# EAGLE board v6_06-19-2018_bluetooth-20x20_bac_panelized (EAGLE 9.0.0), part 1 of 4
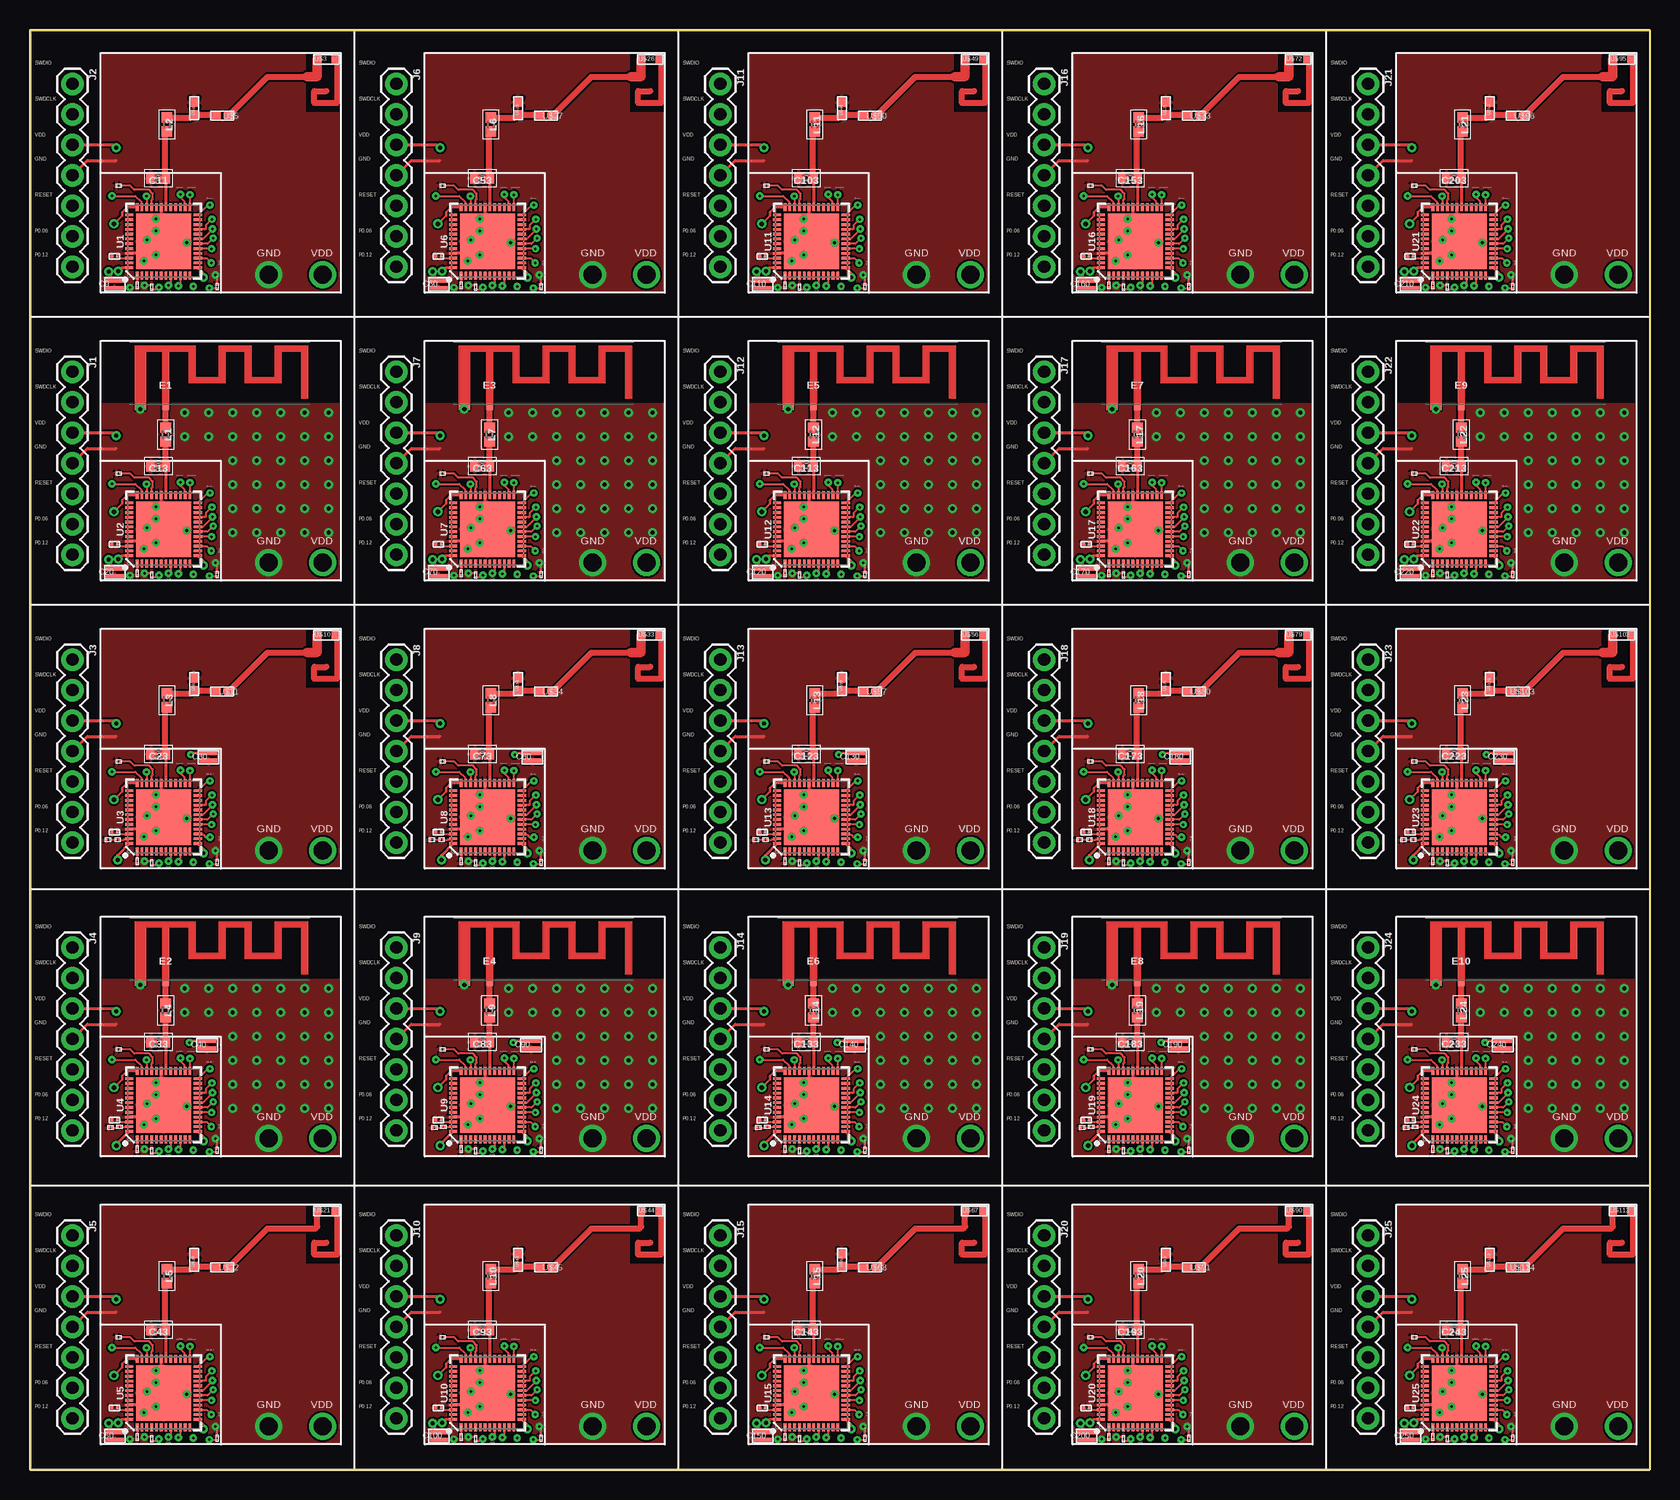
[diagram p0: board, top side]
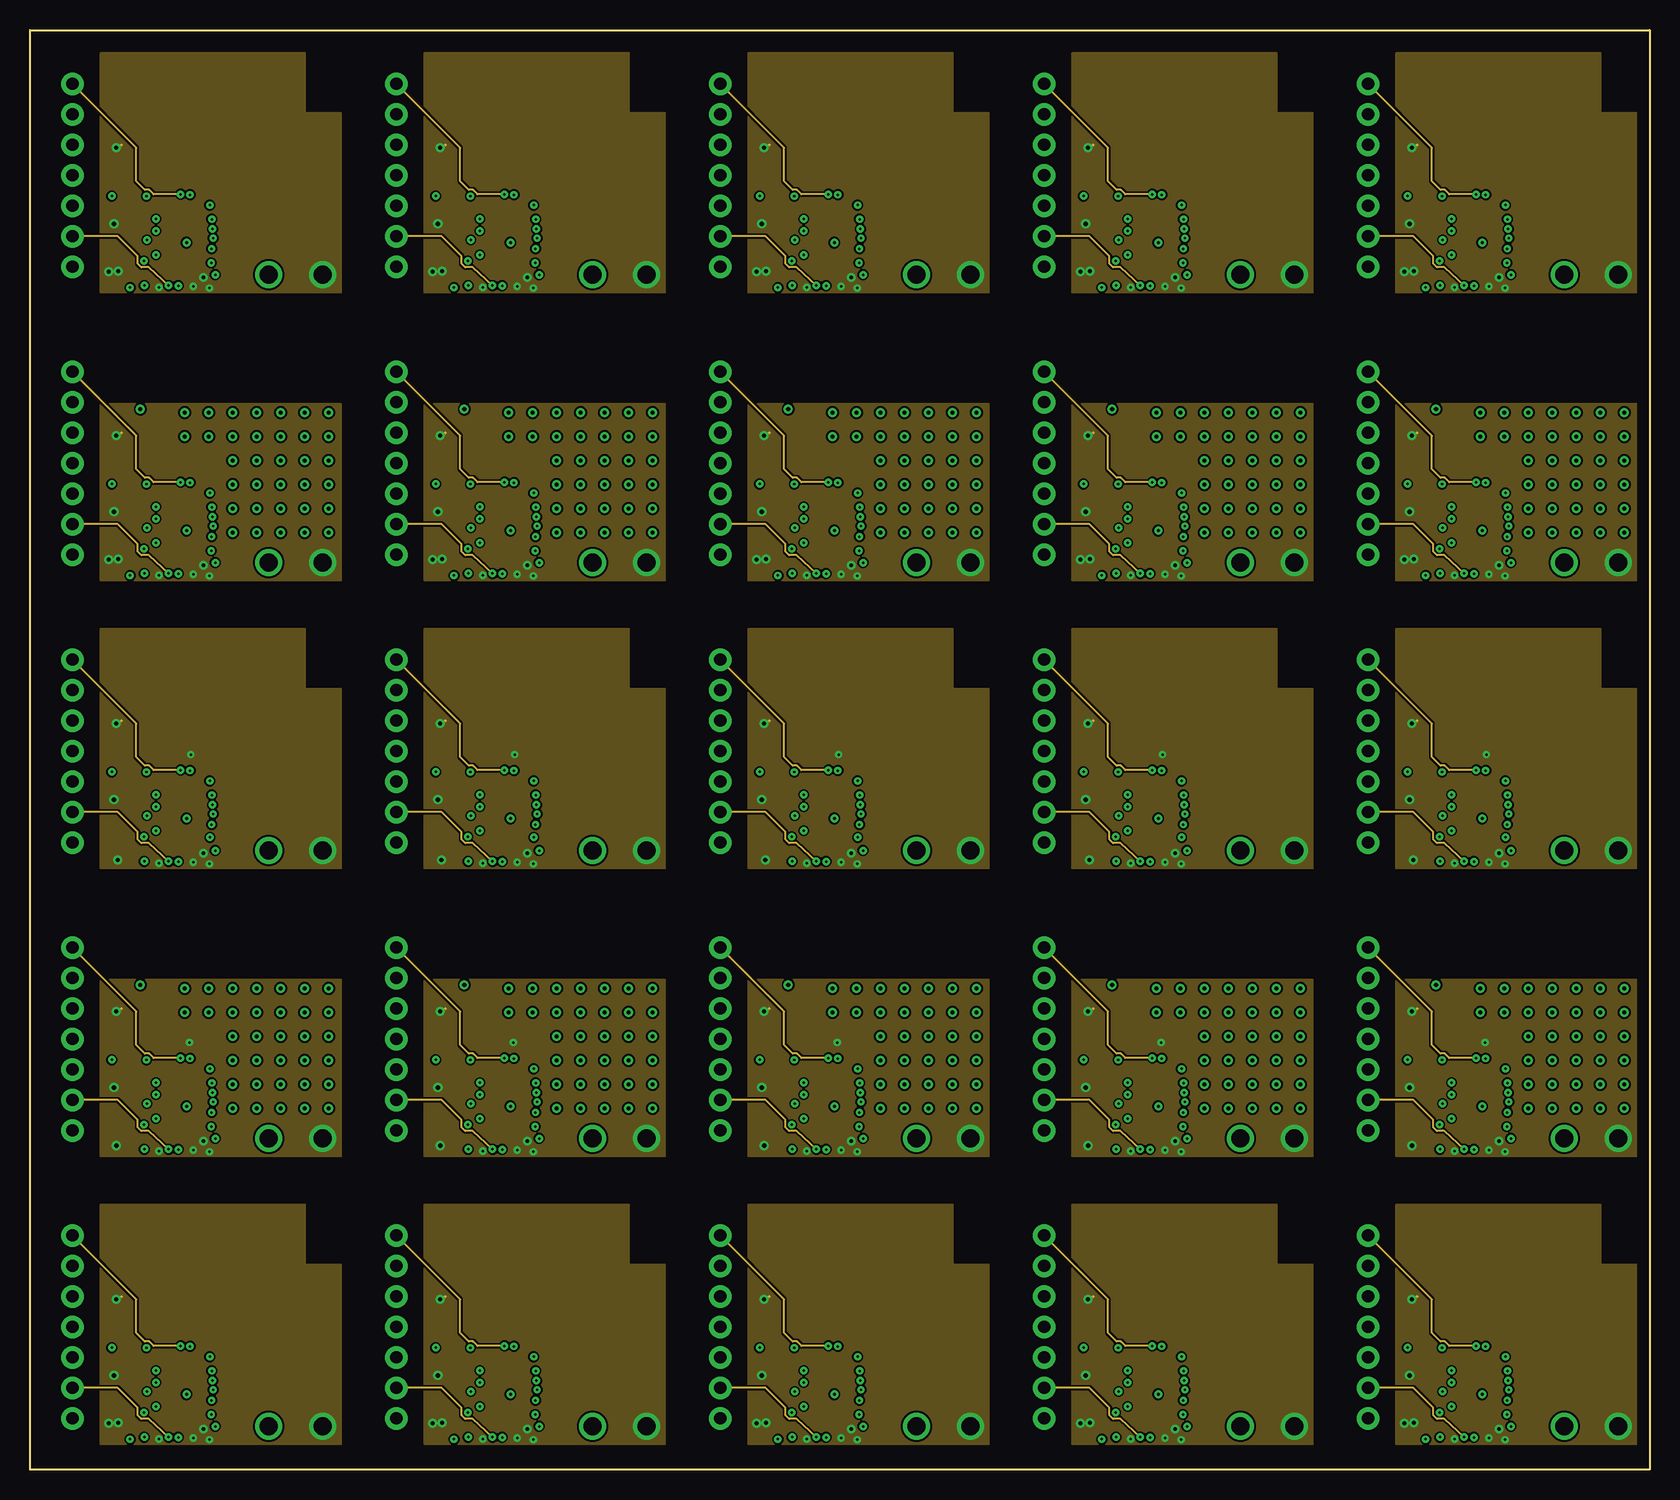
[diagram p1: board, inner layer Route8]
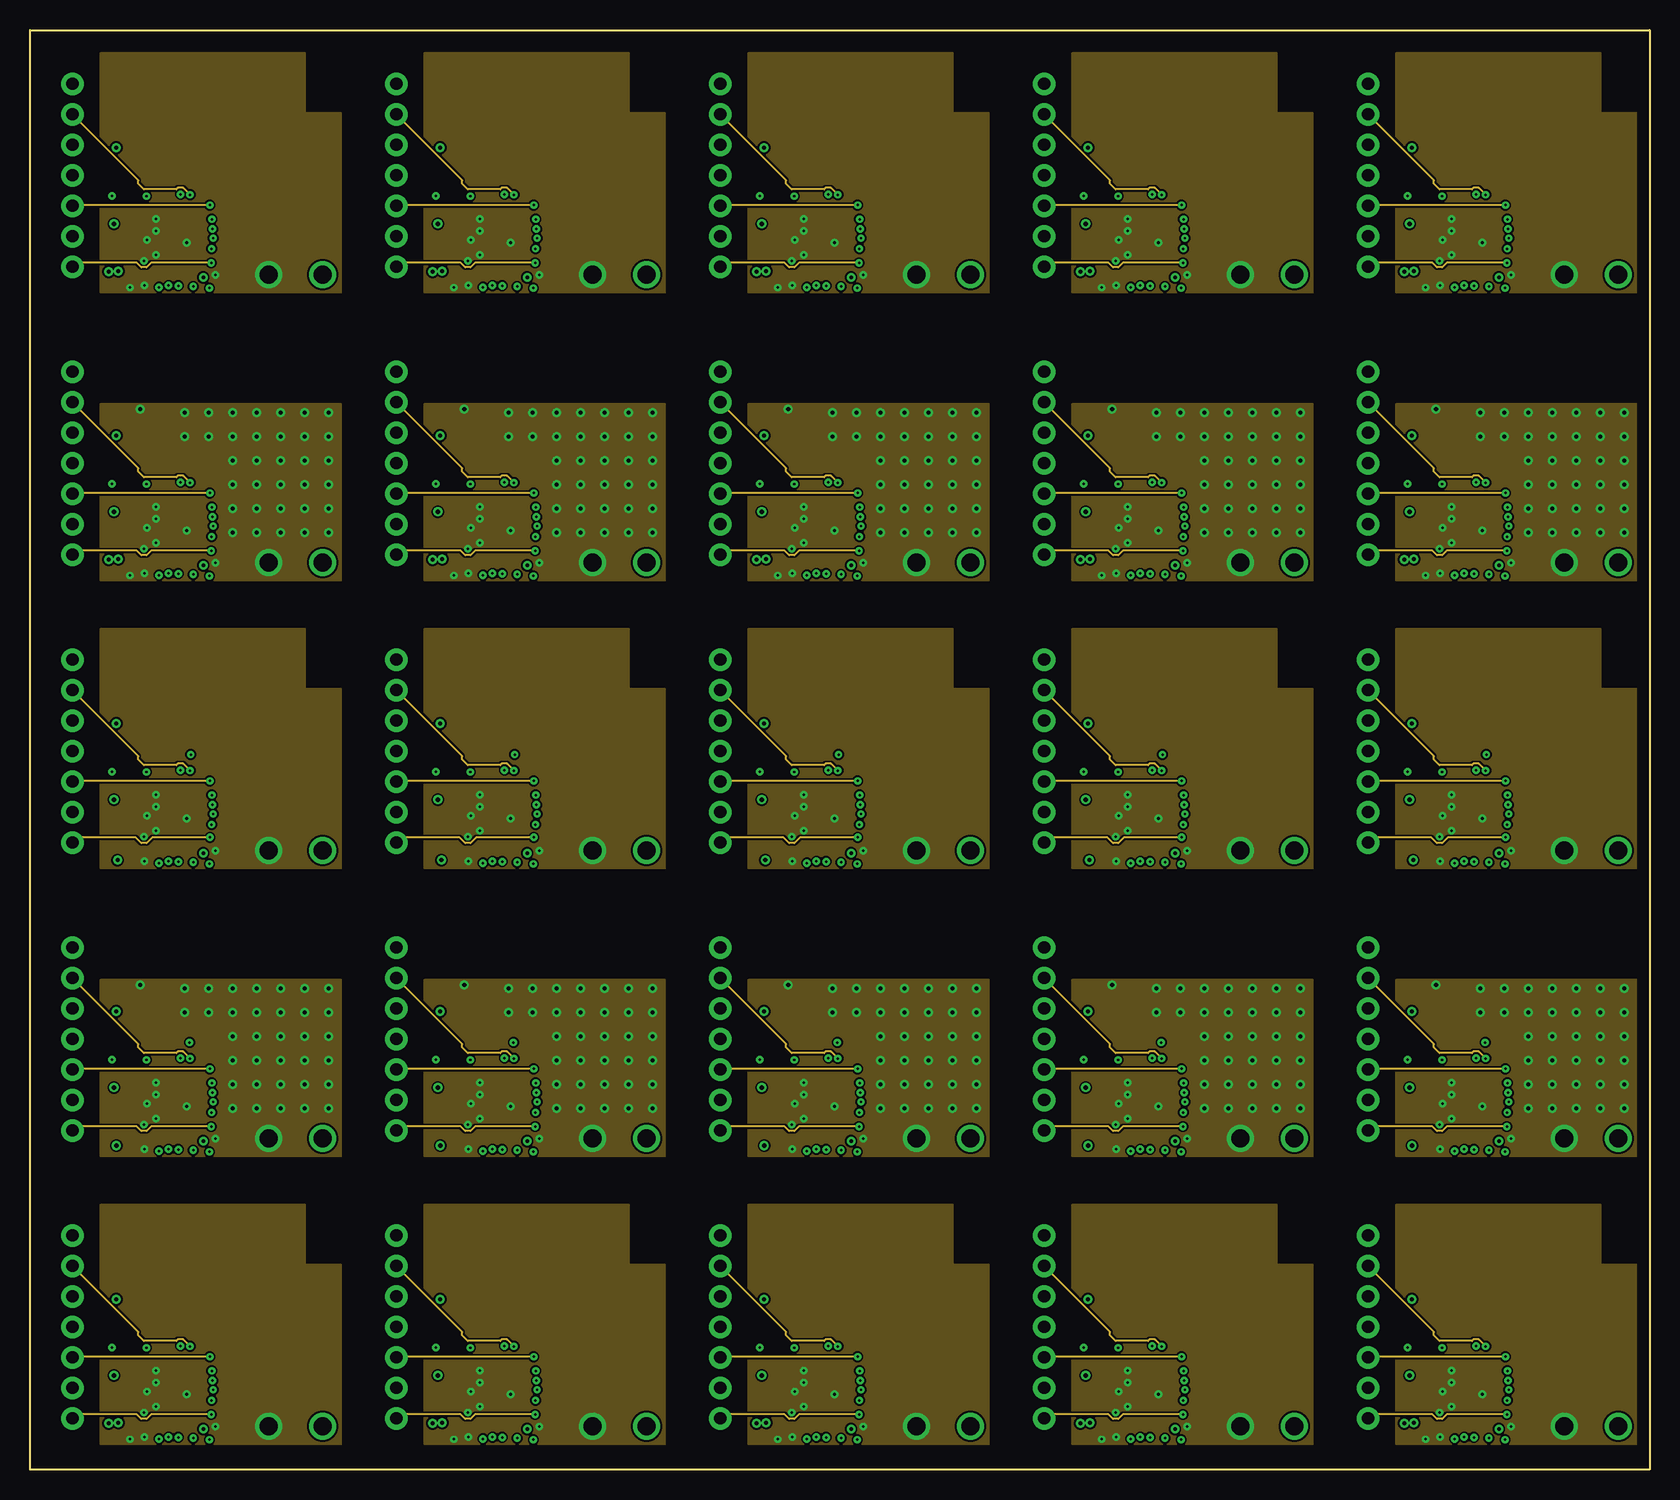
[diagram p2: board, inner layer Route10]
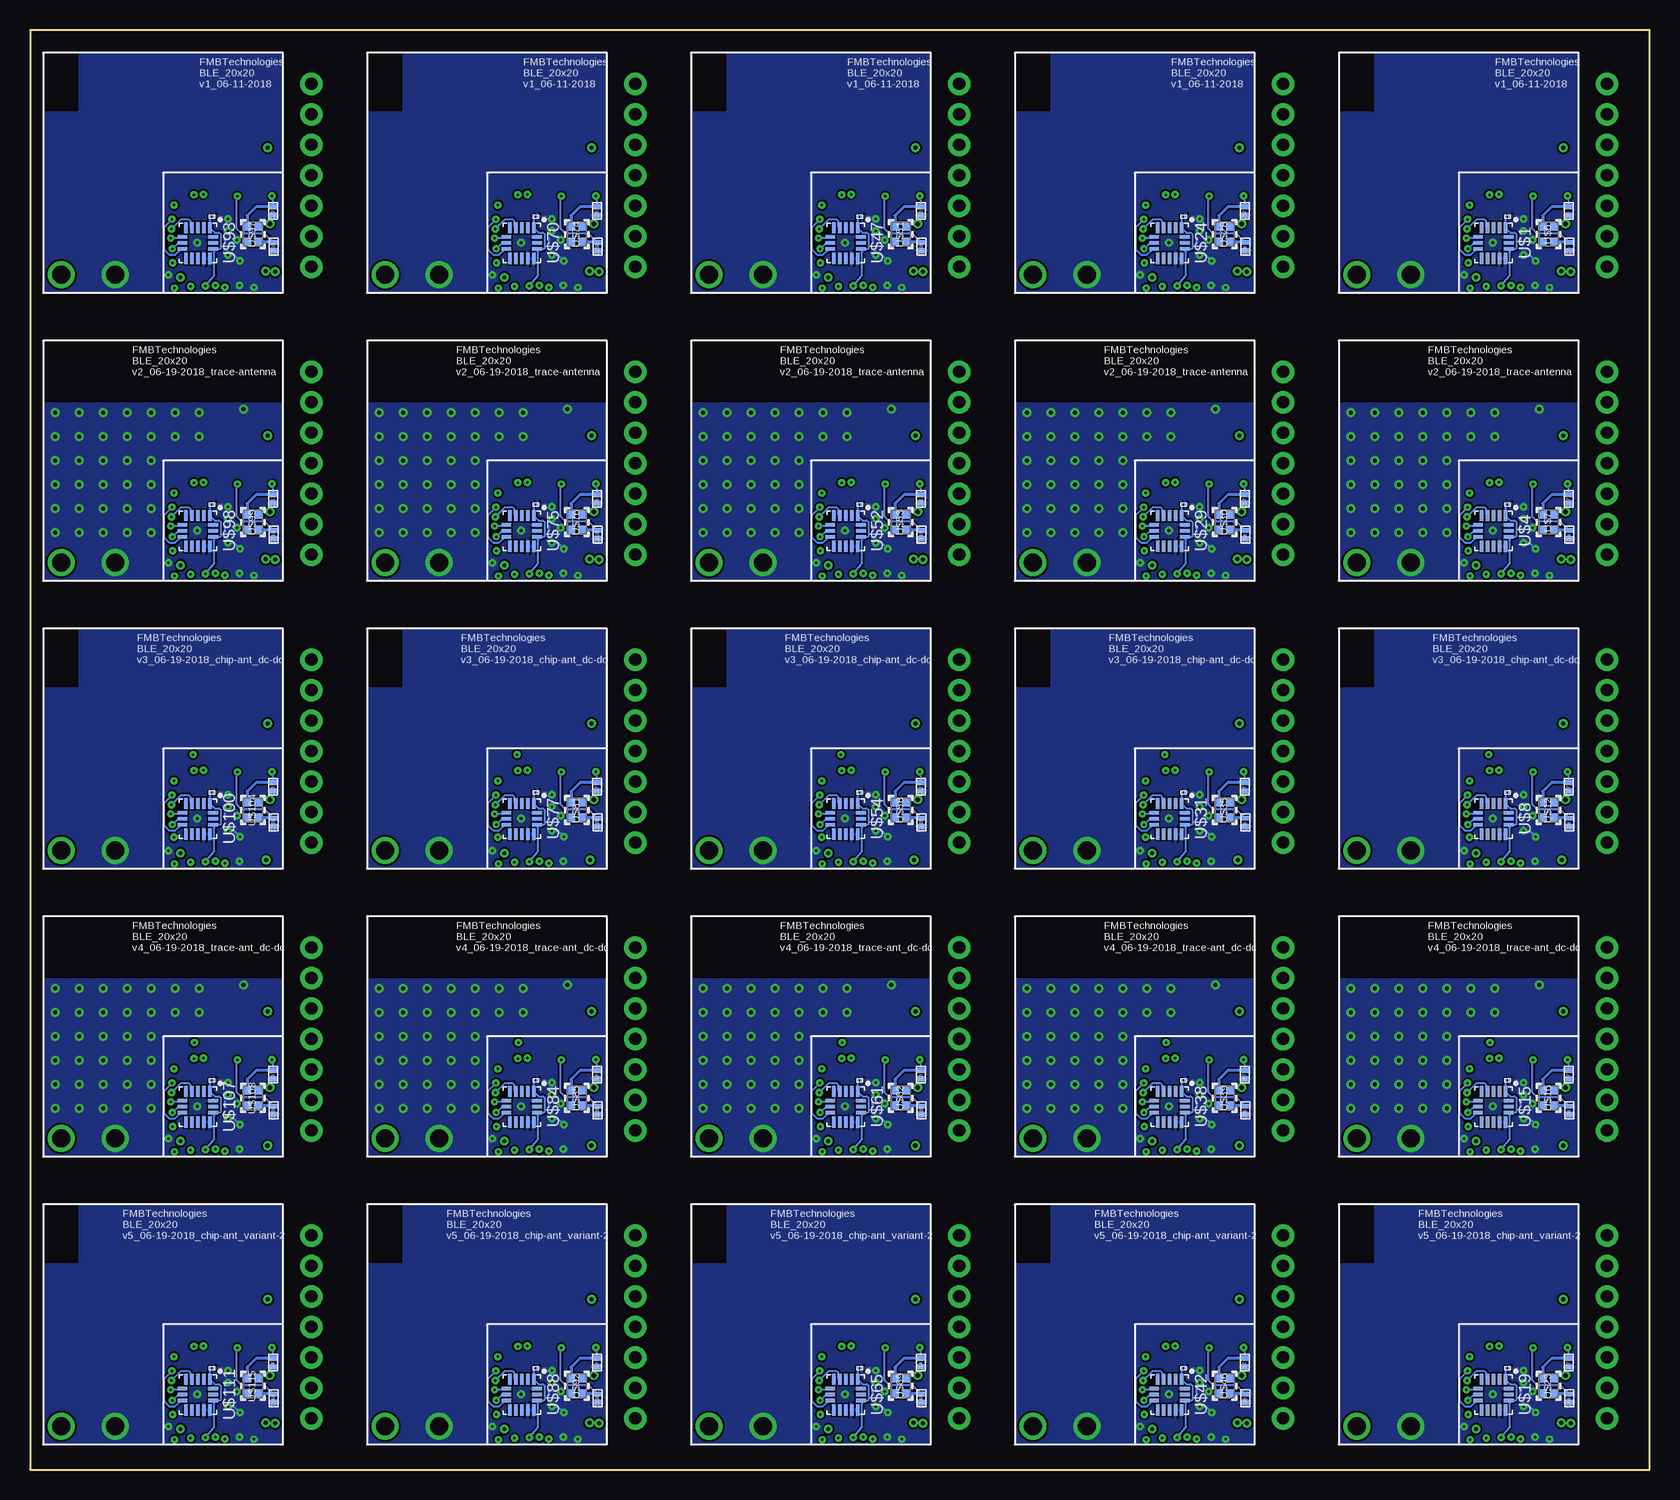
[diagram p3: board, bottom side, seen from below]

Size 135 x 120 mm. Coordinates in mm from the lower left corner, seen from the top.
Outline: 0,0 0,120 135,120 135,0 0,0
Copper layers (1*8*10*16): Top 0.035mm / dielectric 0.175mm / Route8 0.017mm / dielectric 0.145mm / Route10 0.017mm / dielectric 0.175mm / Bottom 0.035mm
Design rules "default *": minimum track width 6mil, minimum drill 8mil, track to track 6mil, track to pad 6mil, pad to pad 6mil, via to via 6mil, smd to smd 6mil, copper to edge 40mil, drill to drill 6mil, minimum pad ring 10mil, minimum via ring 8mil, stop-mask expansion 4mil, vias tented up to drill 0mil, thermal gap 10mil

## Footprints (pad centres in the part's own frame; a part is rotated, then mirrored left to right if it is on the bottom)
CAP_0402-L = smd 0.178 x 0.254: 1 -0.152,0; 2 0.178,0
CAPC1005X55N = smd 0.4 x 0.6: 1 -0.4,0; 2 0.3,0
CAPC0502X28N = smd 0.25 x 0.3: 1 -0.3,0; 2 0.2,0
4P7UFCAPACITOR = smd 0.35 x 1.6: 1 -0.4,0.1; 2 0.25,0.1
0402 = smd 0.85 x 0.9: 1 -0.58,0; 2 0.58,0
TRACE_ANTENNA_2.4GHZ_15.2MM = smd 0.5 x 0.5: ANT 0,-0.25 | smd 0.9 x 0.5: GND -2.1,-0.25
1X07 = drill 1.016 pad 1.88: 1 0,0; 2 2.54,0; 3 5.08,0; 4 7.62,0; 5 10.16,0; 6 12.7,0; 7 15.24,0
QFN48-6X6MM = smd 0.68 x 0.23: 1 -2.86,2.2; 2 -2.86,1.8; 3 -2.86,1.4; 4 -2.86,1; 5 -2.86,0.6; 6 -2.86,0.2; 7 -2.86,-0.2; 8 -2.86,-0.6; 9 -2.86,-1; 10 -2.86,-1.4; 11 -2.86,-1.8; 12 -2.86,-2.2; 25 2.86,-2.2; 26 2.86,-1.8; 27 2.86,-1.4; 28 2.86,-1; 29 2.86,-0.6; 30 2.86,-0.2; 31 2.86,0.2; 32 2.86,0.6; 33 2.86,1; 34 2.86,1.4; 35 2.86,1.8; 36 2.86,2.2 | smd 0.23 x 0.68: 13 -2.2,-2.86; 14 -1.8,-2.86; 15 -1.4,-2.86; 16 -1,-2.86; 17 -0.6,-2.86; 18 -0.2,-2.86; 19 0.2,-2.86; 20 0.6,-2.86; 21 1,-2.86; 22 1.4,-2.86; 23 1.8,-2.86; 24 2.2,-2.86; 37 2.2,2.86; 38 1.8,2.86; 39 1.4,2.86; 40 1,2.86; 41 0.6,2.86; 42 0.2,2.86; 43 -0.2,2.86; 44 -0.6,2.86; 45 -1,2.86; 46 -1.4,2.86; 47 -1.8,2.86; 48 -2.2,2.86 | smd 4.6 x 4.6: EP 0,0
TFLGA-16/3.3MMX3.1MM = smd 0.3 x 0.8: CS 0.5,-1.275; GND@3 -0.5,1.275; MISO 0,-1.275; MOSI -0.5,-1.275; NC@2 0,1.275; VS 0.5,1.275 | smd 0.925 x 0.3: GND@1 1.288,0.5; GND@2 1.288,1; INT1 1.288,0; INT2 1.288,-1; NC@1 -1.288,0.5; RESERVED@1 -1.288,0; RESERVED@2 -1.288,-1; RESERVED@3 1.288,-0.5; SCLK -1.288,-0.5; VDD/IO -1.288,1
0402' = smd 0.75 x 0.75: 1 -1.62,0; 2 -0.57,0
2450AT14A0100 = smd 0.65 x 0.8: FEED 0.3,0.4; NC 1.8,0.4
0402-1005 = smd 0.75 x 0.75: 1 -0.35,0; 2 0.7,0
32MHZCRYSTAL = smd 0.75 x 0.7: 1 0.485,0.47; 2 1.835,0.47; 3 1.835,1.47; 4 0.485,1.47
0402'' = smd 0.178 x 0.254: 1 -0.152,0; 2 0.178,0

## Placement (x,y rotation side)
C1  C0402X5R0G104M020BCCAP_0402-L  [CAP_0402-L]  11.83,104.45 180 bottom
C2  C0402X5R0G104M020BCCAP_0402-L  [CAP_0402-L]  11.83,80.45 180 bottom
C3  C0402X5R0G104M020BCCAP_0402-L  [CAP_0402-L]  8.93,98.72 270 top
C4  C0402C0G1C101J020BCCAP_0402-L  [CAP_0402-L]  7.41,107.03 180 top
C5  C0402X5R0G104M020BCCAP_0402-L  [CAP_0402-L]  15.59,74.62 270 top
C6  GRM1555C1H6R0CA01D  [CAPC1005X55N]  6.72,104.97 90 bottom
C7  GRM1555C1H6R0CA01D  [CAPC1005X55N]  6.68,102 90 bottom
C8  GRMMDXR60J105ME05D  [CAPC0502X28N]  6.99,101.16 180 top
C9  4P7UFCAPACITOR4P7UFCAPACITOR  [4P7UFCAPACITOR]  7.18,98.88 90 top
C10  C0402X5R0G104M020BCCAP_0402-L  [CAP_0402-L]  15.59,98.62 270 top
C11  0.8pF  [0402]  10.7,107.66 0 top
C12  C0402X5R0G104M020BCCAP_0402-L  [CAP_0402-L]  10.13,98.56 270 top
C13  0.8pF  [0402]  10.7,83.66 0 top
C14  C0402X5R0G104M020BCCAP_0402-L  [CAP_0402-L]  10.13,74.56 270 top
C15  C0402X5R0G104M020BCCAP_0402-L  [CAP_0402-L]  8.93,74.72 270 top
C16  C0402C0G1C101J020BCCAP_0402-L  [CAP_0402-L]  7.41,83.03 180 top
C17  GRM1555C1H6R0CA01D  [CAPC1005X55N]  6.72,80.97 90 bottom
C18  GRM1555C1H6R0CA01D  [CAPC1005X55N]  6.68,78 90 bottom
C19  GRMMDXR60J105ME05D  [CAPC0502X28N]  6.99,77.16 180 top
C20  4P7UFCAPACITOR4P7UFCAPACITOR  [4P7UFCAPACITOR]  7.18,74.88 90 top
C21  C0402X5R0G104M020BCCAP_0402-L  [CAP_0402-L]  11.83,56.45 180 bottom
C22  C0402X5R0G104M020BCCAP_0402-L  [CAP_0402-L]  15.59,50.62 270 top
C23  0.8pF  [0402]  10.7,59.66 0 top
C24  C0402X5R0G104M020BCCAP_0402-L  [CAP_0402-L]  10.13,50.56 270 top
C25  C0402X5R0G104M020BCCAP_0402-L  [CAP_0402-L]  8.93,50.72 270 top
C26  C0402C0G1C101J020BCCAP_0402-L  [CAP_0402-L]  7.41,59.03 180 top
C27  GRM1555C1H6R0CA01D  [CAPC1005X55N]  6.72,56.97 90 bottom
C28  GRM1555C1H6R0CA01D  [CAPC1005X55N]  6.68,54 90 bottom
C29  GRMMDXR60J105ME05D  [CAPC0502X28N]  6.99,53.16 180 top
C30  4P7UFCAPACITOR4P7UFCAPACITOR  [4P7UFCAPACITOR]  14.98,59.48 90 top
C31  C0402X5R0G104M020BCCAP_0402-L  [CAP_0402-L]  11.83,32.45 180 bottom
C32  C0402X5R0G104M020BCCAP_0402-L  [CAP_0402-L]  15.59,26.62 270 top
C33  0.8pF  [0402]  10.7,35.66 0 top
C34  C0402X5R0G104M020BCCAP_0402-L  [CAP_0402-L]  10.13,26.56 270 top
C35  C0402X5R0G104M020BCCAP_0402-L  [CAP_0402-L]  8.93,26.72 270 top
C36  C0402C0G1C101J020BCCAP_0402-L  [CAP_0402-L]  7.41,35.03 180 top
C37  GRM1555C1H6R0CA01D  [CAPC1005X55N]  6.72,32.97 90 bottom
C38  GRM1555C1H6R0CA01D  [CAPC1005X55N]  6.68,30 90 bottom
C39  GRMMDXR60J105ME05D  [CAPC0502X28N]  6.99,29.16 180 top
C40  4P7UFCAPACITOR4P7UFCAPACITOR  [4P7UFCAPACITOR]  14.88,35.48 90 top
C41  C0402X5R0G104M020BCCAP_0402-L  [CAP_0402-L]  11.83,8.45 180 bottom
C42  C0402X5R0G104M020BCCAP_0402-L  [CAP_0402-L]  15.59,2.62 270 top
C43  0.8pF  [0402]  10.7,11.66 0 top
C44  C0402X5R0G104M020BCCAP_0402-L  [CAP_0402-L]  10.13,2.56 270 top
C45  C0402X5R0G104M020BCCAP_0402-L  [CAP_0402-L]  8.93,2.72 270 top
C46  C0402C0G1C101J020BCCAP_0402-L  [CAP_0402-L]  7.41,11.03 180 top
C47  GRM1555C1H6R0CA01D  [CAPC1005X55N]  6.72,8.97 90 bottom
C48  GRM1555C1H6R0CA01D  [CAPC1005X55N]  6.68,6 90 bottom
C49  GRMMDXR60J105ME05D  [CAPC0502X28N]  6.99,5.16 180 top
C50  4P7UFCAPACITOR4P7UFCAPACITOR  [4P7UFCAPACITOR]  7.18,2.88 90 top
C51  C0402X5R0G104M020BCCAP_0402-L  [CAP_0402-L]  38.83,104.45 180 bottom
C52  C0402X5R0G104M020BCCAP_0402-L  [CAP_0402-L]  42.59,98.62 270 top
C53  0.8pF  [0402]  37.7,107.66 0 top
C54  C0402X5R0G104M020BCCAP_0402-L  [CAP_0402-L]  37.13,98.56 270 top
C55  C0402X5R0G104M020BCCAP_0402-L  [CAP_0402-L]  35.93,98.72 270 top
C56  C0402C0G1C101J020BCCAP_0402-L  [CAP_0402-L]  34.41,107.03 180 top
C57  GRM1555C1H6R0CA01D  [CAPC1005X55N]  33.72,104.97 90 bottom
C58  GRM1555C1H6R0CA01D  [CAPC1005X55N]  33.68,102 90 bottom
C59  GRMMDXR60J105ME05D  [CAPC0502X28N]  33.99,101.16 180 top
C60  4P7UFCAPACITOR4P7UFCAPACITOR  [4P7UFCAPACITOR]  34.18,98.88 90 top
C61  C0402X5R0G104M020BCCAP_0402-L  [CAP_0402-L]  38.83,80.45 180 bottom
C62  C0402X5R0G104M020BCCAP_0402-L  [CAP_0402-L]  42.59,74.62 270 top
C63  0.8pF  [0402]  37.7,83.66 0 top
C64  C0402X5R0G104M020BCCAP_0402-L  [CAP_0402-L]  37.13,74.56 270 top
C65  C0402X5R0G104M020BCCAP_0402-L  [CAP_0402-L]  35.93,74.72 270 top
C66  C0402C0G1C101J020BCCAP_0402-L  [CAP_0402-L]  34.41,83.03 180 top
C67  GRM1555C1H6R0CA01D  [CAPC1005X55N]  33.72,80.97 90 bottom
C68  GRM1555C1H6R0CA01D  [CAPC1005X55N]  33.68,78 90 bottom
C69  GRMMDXR60J105ME05D  [CAPC0502X28N]  33.99,77.16 180 top
C70  4P7UFCAPACITOR4P7UFCAPACITOR  [4P7UFCAPACITOR]  34.18,74.88 90 top
C71  C0402X5R0G104M020BCCAP_0402-L  [CAP_0402-L]  38.83,56.45 180 bottom
C72  C0402X5R0G104M020BCCAP_0402-L  [CAP_0402-L]  42.59,50.62 270 top
C73  0.8pF  [0402]  37.7,59.66 0 top
C74  C0402X5R0G104M020BCCAP_0402-L  [CAP_0402-L]  37.13,50.56 270 top
C75  C0402X5R0G104M020BCCAP_0402-L  [CAP_0402-L]  35.93,50.72 270 top
C76  C0402C0G1C101J020BCCAP_0402-L  [CAP_0402-L]  34.41,59.03 180 top
C77  GRM1555C1H6R0CA01D  [CAPC1005X55N]  33.72,56.97 90 bottom
C78  GRM1555C1H6R0CA01D  [CAPC1005X55N]  33.68,54 90 bottom
C79  GRMMDXR60J105ME05D  [CAPC0502X28N]  33.99,53.16 180 top
C80  4P7UFCAPACITOR4P7UFCAPACITOR  [4P7UFCAPACITOR]  41.98,59.48 90 top
C81  C0402X5R0G104M020BCCAP_0402-L  [CAP_0402-L]  38.83,32.45 180 bottom
C82  C0402X5R0G104M020BCCAP_0402-L  [CAP_0402-L]  42.59,26.62 270 top
C83  0.8pF  [0402]  37.7,35.66 0 top
C84  C0402X5R0G104M020BCCAP_0402-L  [CAP_0402-L]  37.13,26.56 270 top
C85  C0402X5R0G104M020BCCAP_0402-L  [CAP_0402-L]  35.93,26.72 270 top
C86  C0402C0G1C101J020BCCAP_0402-L  [CAP_0402-L]  34.41,35.03 180 top
C87  GRM1555C1H6R0CA01D  [CAPC1005X55N]  33.72,32.97 90 bottom
C88  GRM1555C1H6R0CA01D  [CAPC1005X55N]  33.68,30 90 bottom
C89  GRMMDXR60J105ME05D  [CAPC0502X28N]  33.99,29.16 180 top
C90  4P7UFCAPACITOR4P7UFCAPACITOR  [4P7UFCAPACITOR]  41.88,35.48 90 top
C91  C0402X5R0G104M020BCCAP_0402-L  [CAP_0402-L]  38.83,8.45 180 bottom
C92  C0402X5R0G104M020BCCAP_0402-L  [CAP_0402-L]  42.59,2.62 270 top
C93  0.8pF  [0402]  37.7,11.66 0 top
C94  C0402X5R0G104M020BCCAP_0402-L  [CAP_0402-L]  37.13,2.56 270 top
C95  C0402X5R0G104M020BCCAP_0402-L  [CAP_0402-L]  35.93,2.72 270 top
C96  C0402C0G1C101J020BCCAP_0402-L  [CAP_0402-L]  34.41,11.03 180 top
C97  GRM1555C1H6R0CA01D  [CAPC1005X55N]  33.72,8.97 90 bottom
C98  GRM1555C1H6R0CA01D  [CAPC1005X55N]  33.68,6 90 bottom
C99  GRMMDXR60J105ME05D  [CAPC0502X28N]  33.99,5.16 180 top
C100  4P7UFCAPACITOR4P7UFCAPACITOR  [4P7UFCAPACITOR]  34.18,2.88 90 top
C101  C0402X5R0G104M020BCCAP_0402-L  [CAP_0402-L]  65.83,104.45 180 bottom
C102  C0402X5R0G104M020BCCAP_0402-L  [CAP_0402-L]  69.59,98.62 270 top
C103  0.8pF  [0402]  64.7,107.66 0 top
C104  C0402X5R0G104M020BCCAP_0402-L  [CAP_0402-L]  64.13,98.56 270 top
C105  C0402X5R0G104M020BCCAP_0402-L  [CAP_0402-L]  62.93,98.72 270 top
C106  C0402C0G1C101J020BCCAP_0402-L  [CAP_0402-L]  61.41,107.03 180 top
C107  GRM1555C1H6R0CA01D  [CAPC1005X55N]  60.72,104.97 90 bottom
C108  GRM1555C1H6R0CA01D  [CAPC1005X55N]  60.68,102 90 bottom
C109  GRMMDXR60J105ME05D  [CAPC0502X28N]  60.99,101.16 180 top
C110  4P7UFCAPACITOR4P7UFCAPACITOR  [4P7UFCAPACITOR]  61.18,98.88 90 top
C111  C0402X5R0G104M020BCCAP_0402-L  [CAP_0402-L]  65.83,80.45 180 bottom
C112  C0402X5R0G104M020BCCAP_0402-L  [CAP_0402-L]  69.59,74.62 270 top
C113  0.8pF  [0402]  64.7,83.66 0 top
C114  C0402X5R0G104M020BCCAP_0402-L  [CAP_0402-L]  64.13,74.56 270 top
C115  C0402X5R0G104M020BCCAP_0402-L  [CAP_0402-L]  62.93,74.72 270 top
C116  C0402C0G1C101J020BCCAP_0402-L  [CAP_0402-L]  61.41,83.03 180 top
C117  GRM1555C1H6R0CA01D  [CAPC1005X55N]  60.72,80.97 90 bottom
C118  GRM1555C1H6R0CA01D  [CAPC1005X55N]  60.68,78 90 bottom
C119  GRMMDXR60J105ME05D  [CAPC0502X28N]  60.99,77.16 180 top
C120  4P7UFCAPACITOR4P7UFCAPACITOR  [4P7UFCAPACITOR]  61.18,74.88 90 top
C121  C0402X5R0G104M020BCCAP_0402-L  [CAP_0402-L]  65.83,56.45 180 bottom
C122  C0402X5R0G104M020BCCAP_0402-L  [CAP_0402-L]  69.59,50.62 270 top
C123  0.8pF  [0402]  64.7,59.66 0 top
C124  C0402X5R0G104M020BCCAP_0402-L  [CAP_0402-L]  64.13,50.56 270 top
C125  C0402X5R0G104M020BCCAP_0402-L  [CAP_0402-L]  62.93,50.72 270 top
C126  C0402C0G1C101J020BCCAP_0402-L  [CAP_0402-L]  61.41,59.03 180 top
C127  GRM1555C1H6R0CA01D  [CAPC1005X55N]  60.72,56.97 90 bottom
C128  GRM1555C1H6R0CA01D  [CAPC1005X55N]  60.68,54 90 bottom
C129  GRMMDXR60J105ME05D  [CAPC0502X28N]  60.99,53.16 180 top
C130  4P7UFCAPACITOR4P7UFCAPACITOR  [4P7UFCAPACITOR]  68.98,59.48 90 top
C131  C0402X5R0G104M020BCCAP_0402-L  [CAP_0402-L]  65.83,32.45 180 bottom
C132  C0402X5R0G104M020BCCAP_0402-L  [CAP_0402-L]  69.59,26.62 270 top
C133  0.8pF  [0402]  64.7,35.66 0 top
C134  C0402X5R0G104M020BCCAP_0402-L  [CAP_0402-L]  64.13,26.56 270 top
C135  C0402X5R0G104M020BCCAP_0402-L  [CAP_0402-L]  62.93,26.72 270 top
C136  C0402C0G1C101J020BCCAP_0402-L  [CAP_0402-L]  61.41,35.03 180 top
C137  GRM1555C1H6R0CA01D  [CAPC1005X55N]  60.72,32.97 90 bottom
C138  GRM1555C1H6R0CA01D  [CAPC1005X55N]  60.68,30 90 bottom
C139  GRMMDXR60J105ME05D  [CAPC0502X28N]  60.99,29.16 180 top
C140  4P7UFCAPACITOR4P7UFCAPACITOR  [4P7UFCAPACITOR]  68.88,35.48 90 top
C141  C0402X5R0G104M020BCCAP_0402-L  [CAP_0402-L]  65.83,8.45 180 bottom
C142  C0402X5R0G104M020BCCAP_0402-L  [CAP_0402-L]  69.59,2.62 270 top
C143  0.8pF  [0402]  64.7,11.66 0 top
C144  C0402X5R0G104M020BCCAP_0402-L  [CAP_0402-L]  64.13,2.56 270 top
C145  C0402X5R0G104M020BCCAP_0402-L  [CAP_0402-L]  62.93,2.72 270 top
C146  C0402C0G1C101J020BCCAP_0402-L  [CAP_0402-L]  61.41,11.03 180 top
C147  GRM1555C1H6R0CA01D  [CAPC1005X55N]  60.72,8.97 90 bottom
C148  GRM1555C1H6R0CA01D  [CAPC1005X55N]  60.68,6 90 bottom
C149  GRMMDXR60J105ME05D  [CAPC0502X28N]  60.99,5.16 180 top
C150  4P7UFCAPACITOR4P7UFCAPACITOR  [4P7UFCAPACITOR]  61.18,2.88 90 top
C151  C0402X5R0G104M020BCCAP_0402-L  [CAP_0402-L]  92.83,104.45 180 bottom
C152  C0402X5R0G104M020BCCAP_0402-L  [CAP_0402-L]  96.59,98.62 270 top
C153  0.8pF  [0402]  91.7,107.66 0 top
C154  C0402X5R0G104M020BCCAP_0402-L  [CAP_0402-L]  91.13,98.56 270 top
C155  C0402X5R0G104M020BCCAP_0402-L  [CAP_0402-L]  89.93,98.72 270 top
C156  C0402C0G1C101J020BCCAP_0402-L  [CAP_0402-L]  88.41,107.03 180 top
C157  GRM1555C1H6R0CA01D  [CAPC1005X55N]  87.72,104.97 90 bottom
C158  GRM1555C1H6R0CA01D  [CAPC1005X55N]  87.68,102 90 bottom
C159  GRMMDXR60J105ME05D  [CAPC0502X28N]  87.99,101.16 180 top
C160  4P7UFCAPACITOR4P7UFCAPACITOR  [4P7UFCAPACITOR]  88.18,98.88 90 top
C161  C0402X5R0G104M020BCCAP_0402-L  [CAP_0402-L]  92.83,80.45 180 bottom
C162  C0402X5R0G104M020BCCAP_0402-L  [CAP_0402-L]  96.59,74.62 270 top
C163  0.8pF  [0402]  91.7,83.66 0 top
C164  C0402X5R0G104M020BCCAP_0402-L  [CAP_0402-L]  91.13,74.56 270 top
C165  C0402X5R0G104M020BCCAP_0402-L  [CAP_0402-L]  89.93,74.72 270 top
C166  C0402C0G1C101J020BCCAP_0402-L  [CAP_0402-L]  88.41,83.03 180 top
C167  GRM1555C1H6R0CA01D  [CAPC1005X55N]  87.72,80.97 90 bottom
C168  GRM1555C1H6R0CA01D  [CAPC1005X55N]  87.68,78 90 bottom
C169  GRMMDXR60J105ME05D  [CAPC0502X28N]  87.99,77.16 180 top
C170  4P7UFCAPACITOR4P7UFCAPACITOR  [4P7UFCAPACITOR]  88.18,74.88 90 top
C171  C0402X5R0G104M020BCCAP_0402-L  [CAP_0402-L]  92.83,56.45 180 bottom
C172  C0402X5R0G104M020BCCAP_0402-L  [CAP_0402-L]  96.59,50.62 270 top
C173  0.8pF  [0402]  91.7,59.66 0 top
C174  C0402X5R0G104M020BCCAP_0402-L  [CAP_0402-L]  91.13,50.56 270 top
C175  C0402X5R0G104M020BCCAP_0402-L  [CAP_0402-L]  89.93,50.72 270 top
C176  C0402C0G1C101J020BCCAP_0402-L  [CAP_0402-L]  88.41,59.03 180 top
C177  GRM1555C1H6R0CA01D  [CAPC1005X55N]  87.72,56.97 90 bottom
C178  GRM1555C1H6R0CA01D  [CAPC1005X55N]  87.68,54 90 bottom
C179  GRMMDXR60J105ME05D  [CAPC0502X28N]  87.99,53.16 180 top
C180  4P7UFCAPACITOR4P7UFCAPACITOR  [4P7UFCAPACITOR]  95.98,59.48 90 top
C181  C0402X5R0G104M020BCCAP_0402-L  [CAP_0402-L]  92.83,32.45 180 bottom
C182  C0402X5R0G104M020BCCAP_0402-L  [CAP_0402-L]  96.59,26.62 270 top
C183  0.8pF  [0402]  91.7,35.66 0 top
C184  C0402X5R0G104M020BCCAP_0402-L  [CAP_0402-L]  91.13,26.56 270 top
C185  C0402X5R0G104M020BCCAP_0402-L  [CAP_0402-L]  89.93,26.72 270 top
C186  C0402C0G1C101J020BCCAP_0402-L  [CAP_0402-L]  88.41,35.03 180 top
C187  GRM1555C1H6R0CA01D  [CAPC1005X55N]  87.72,32.97 90 bottom
C188  GRM1555C1H6R0CA01D  [CAPC1005X55N]  87.68,30 90 bottom
C189  GRMMDXR60J105ME05D  [CAPC0502X28N]  87.99,29.16 180 top
C190  4P7UFCAPACITOR4P7UFCAPACITOR  [4P7UFCAPACITOR]  95.88,35.48 90 top
C191  C0402X5R0G104M020BCCAP_0402-L  [CAP_0402-L]  92.83,8.45 180 bottom
C192  C0402X5R0G104M020BCCAP_0402-L  [CAP_0402-L]  96.59,2.62 270 top
C193  0.8pF  [0402]  91.7,11.66 0 top
C194  C0402X5R0G104M020BCCAP_0402-L  [CAP_0402-L]  91.13,2.56 270 top
C195  C0402X5R0G104M020BCCAP_0402-L  [CAP_0402-L]  89.93,2.72 270 top
C196  C0402C0G1C101J020BCCAP_0402-L  [CAP_0402-L]  88.41,11.03 180 top
C197  GRM1555C1H6R0CA01D  [CAPC1005X55N]  87.72,8.97 90 bottom
C198  GRM1555C1H6R0CA01D  [CAPC1005X55N]  87.68,6 90 bottom
C199  GRMMDXR60J105ME05D  [CAPC0502X28N]  87.99,5.16 180 top
C200  4P7UFCAPACITOR4P7UFCAPACITOR  [4P7UFCAPACITOR]  88.18,2.88 90 top
C201  C0402X5R0G104M020BCCAP_0402-L  [CAP_0402-L]  119.83,104.45 180 bottom
C202  C0402X5R0G104M020BCCAP_0402-L  [CAP_0402-L]  123.59,98.62 270 top
C203  0.8pF  [0402]  118.7,107.66 0 top
C204  C0402X5R0G104M020BCCAP_0402-L  [CAP_0402-L]  118.13,98.56 270 top
C205  C0402X5R0G104M020BCCAP_0402-L  [CAP_0402-L]  116.93,98.72 270 top
C206  C0402C0G1C101J020BCCAP_0402-L  [CAP_0402-L]  115.41,107.03 180 top
C207  GRM1555C1H6R0CA01D  [CAPC1005X55N]  114.72,104.97 90 bottom
C208  GRM1555C1H6R0CA01D  [CAPC1005X55N]  114.68,102 90 bottom
C209  GRMMDXR60J105ME05D  [CAPC0502X28N]  114.99,101.16 180 top
C210  4P7UFCAPACITOR4P7UFCAPACITOR  [4P7UFCAPACITOR]  115.18,98.88 90 top
C211  C0402X5R0G104M020BCCAP_0402-L  [CAP_0402-L]  119.83,80.45 180 bottom
C212  C0402X5R0G104M020BCCAP_0402-L  [CAP_0402-L]  123.59,74.62 270 top
C213  0.8pF  [0402]  118.7,83.66 0 top
C214  C0402X5R0G104M020BCCAP_0402-L  [CAP_0402-L]  118.13,74.56 270 top
C215  C0402X5R0G104M020BCCAP_0402-L  [CAP_0402-L]  116.93,74.72 270 top
C216  C0402C0G1C101J020BCCAP_0402-L  [CAP_0402-L]  115.41,83.03 180 top
C217  GRM1555C1H6R0CA01D  [CAPC1005X55N]  114.72,80.97 90 bottom
C218  GRM1555C1H6R0CA01D  [CAPC1005X55N]  114.68,78 90 bottom
C219  GRMMDXR60J105ME05D  [CAPC0502X28N]  114.99,77.16 180 top
C220  4P7UFCAPACITOR4P7UFCAPACITOR  [4P7UFCAPACITOR]  115.18,74.88 90 top
C221  C0402X5R0G104M020BCCAP_0402-L  [CAP_0402-L]  119.83,56.45 180 bottom
C222  C0402X5R0G104M020BCCAP_0402-L  [CAP_0402-L]  123.59,50.62 270 top
C223  0.8pF  [0402]  118.7,59.66 0 top
C224  C0402X5R0G104M020BCCAP_0402-L  [CAP_0402-L]  118.13,50.56 270 top
C225  C0402X5R0G104M020BCCAP_0402-L  [CAP_0402-L]  116.93,50.72 270 top
C226  C0402C0G1C101J020BCCAP_0402-L  [CAP_0402-L]  115.41,59.03 180 top
C227  GRM1555C1H6R0CA01D  [CAPC1005X55N]  114.72,56.97 90 bottom
C228  GRM1555C1H6R0CA01D  [CAPC1005X55N]  114.68,54 90 bottom
C229  GRMMDXR60J105ME05D  [CAPC0502X28N]  114.99,53.16 180 top
C230  4P7UFCAPACITOR4P7UFCAPACITOR  [4P7UFCAPACITOR]  122.98,59.48 90 top
C231  C0402X5R0G104M020BCCAP_0402-L  [CAP_0402-L]  119.83,32.45 180 bottom
C232  C0402X5R0G104M020BCCAP_0402-L  [CAP_0402-L]  123.59,26.62 270 top
C233  0.8pF  [0402]  118.7,35.66 0 top
C234  C0402X5R0G104M020BCCAP_0402-L  [CAP_0402-L]  118.13,26.56 270 top
C235  C0402X5R0G104M020BCCAP_0402-L  [CAP_0402-L]  116.93,26.72 270 top
C236  C0402C0G1C101J020BCCAP_0402-L  [CAP_0402-L]  115.41,35.03 180 top
C237  GRM1555C1H6R0CA01D  [CAPC1005X55N]  114.72,32.97 90 bottom
C238  GRM1555C1H6R0CA01D  [CAPC1005X55N]  114.68,30 90 bottom
C239  GRMMDXR60J105ME05D  [CAPC0502X28N]  114.99,29.16 180 top
C240  4P7UFCAPACITOR4P7UFCAPACITOR  [4P7UFCAPACITOR]  122.88,35.48 90 top
C241  C0402X5R0G104M020BCCAP_0402-L  [CAP_0402-L]  119.83,8.45 180 bottom
C242  C0402X5R0G104M020BCCAP_0402-L  [CAP_0402-L]  123.59,2.62 270 top
C243  0.8pF  [0402]  118.7,11.66 0 top
C244  C0402X5R0G104M020BCCAP_0402-L  [CAP_0402-L]  118.13,2.56 270 top
C245  C0402X5R0G104M020BCCAP_0402-L  [CAP_0402-L]  116.93,2.72 270 top
C246  C0402C0G1C101J020BCCAP_0402-L  [CAP_0402-L]  115.41,11.03 180 top
C247  GRM1555C1H6R0CA01D  [CAPC1005X55N]  114.72,8.97 90 bottom
C248  GRM1555C1H6R0CA01D  [CAPC1005X55N]  114.68,6 90 bottom
C249  GRMMDXR60J105ME05D  [CAPC0502X28N]  114.99,5.16 180 top
C250  4P7UFCAPACITOR4P7UFCAPACITOR  [4P7UFCAPACITOR]  115.18,2.88 90 top
E1  ANT  [TRACE_ANTENNA_2.4GHZ_15.2MM]  11.3,88.8 0 top
E2  ANT  [TRACE_ANTENNA_2.4GHZ_15.2MM]  11.3,40.8 0 top
E3  ANT  [TRACE_ANTENNA_2.4GHZ_15.2MM]  38.3,88.8 0 top
E4  ANT  [TRACE_ANTENNA_2.4GHZ_15.2MM]  38.3,40.8 0 top
E5  ANT  [TRACE_ANTENNA_2.4GHZ_15.2MM]  65.3,88.8 0 top
E6  ANT  [TRACE_ANTENNA_2.4GHZ_15.2MM]  65.3,40.8 0 top
E7  ANT  [TRACE_ANTENNA_2.4GHZ_15.2MM]  92.3,88.8 0 top
E8  ANT  [TRACE_ANTENNA_2.4GHZ_15.2MM]  92.3,40.8 0 top
E9  ANT  [TRACE_ANTENNA_2.4GHZ_15.2MM]  119.3,88.8 0 top
E10  ANT  [TRACE_ANTENNA_2.4GHZ_15.2MM]  119.3,40.8 0 top
J1  header  [1X07]  3.54,91.51 270 top
J2  header  [1X07]  3.54,115.51 270 top
J3  header  [1X07]  3.54,67.51 270 top
J4  header  [1X07]  3.54,43.51 270 top
J5  header  [1X07]  3.54,19.51 270 top
J6  header  [1X07]  30.54,115.51 270 top
J7  header  [1X07]  30.54,91.51 270 top
J8  header  [1X07]  30.54,67.51 270 top
J9  header  [1X07]  30.54,43.51 270 top
J10  header  [1X07]  30.54,19.51 270 top
J11  header  [1X07]  57.54,115.51 270 top
J12  header  [1X07]  57.54,91.51 270 top
J13  header  [1X07]  57.54,67.51 270 top
J14  header  [1X07]  57.54,43.51 270 top
J15  header  [1X07]  57.54,19.51 270 top
J16  header  [1X07]  84.54,115.51 270 top
J17  header  [1X07]  84.54,91.51 270 top
J18  header  [1X07]  84.54,67.51 270 top
J19  header  [1X07]  84.54,43.51 270 top
J20  header  [1X07]  84.54,19.51 270 top
J21  header  [1X07]  111.54,115.51 270 top
J22  header  [1X07]  111.54,91.51 270 top
J23  header  [1X07]  111.54,67.51 270 top
J24  header  [1X07]  111.54,43.51 270 top
J25  header  [1X07]  111.54,19.51 270 top
L1  3.9nH  [0402]  11.31,86.28 90 top
L2  3.9nH  [0402]  11.41,112.13 90 top
L3  3.9nH  [0402]  11.41,64.13 90 top
L4  3.9nH  [0402]  11.31,38.28 90 top
L5  3.9nH  [0402]  11.41,16.13 90 top
L6  3.9nH  [0402]  38.41,112.13 90 top
L7  3.9nH  [0402]  38.31,86.28 90 top
L8  3.9nH  [0402]  38.41,64.13 90 top
L9  3.9nH  [0402]  38.31,38.28 90 top
L10  3.9nH  [0402]  38.41,16.13 90 top
L11  3.9nH  [0402]  65.41,112.13 90 top
L12  3.9nH  [0402]  65.31,86.28 90 top
L13  3.9nH  [0402]  65.41,64.13 90 top
L14  3.9nH  [0402]  65.31,38.28 90 top
L15  3.9nH  [0402]  65.41,16.13 90 top
L16  3.9nH  [0402]  92.41,112.13 90 top
L17  3.9nH  [0402]  92.31,86.28 90 top
L18  3.9nH  [0402]  92.41,64.13 90 top
L19  3.9nH  [0402]  92.31,38.28 90 top
L20  3.9nH  [0402]  92.41,16.13 90 top
L21  3.9nH  [0402]  119.41,112.13 90 top
L22  3.9nH  [0402]  119.31,86.28 90 top
L23  3.9nH  [0402]  119.41,64.13 90 top
L24  3.9nH  [0402]  119.31,38.28 90 top
L25  3.9nH  [0402]  119.41,16.13 90 top
U1  NRF52832  [QFN48-6X6MM]  11.14,102.38 90 top
U2  NRF52832  [QFN48-6X6MM]  11.14,78.38 90 top
U3  NRF52832  [QFN48-6X6MM]  11.14,54.38 90 top
U4  NRF52832  [QFN48-6X6MM]  11.14,30.38 90 top
U5  NRF52832  [QFN48-6X6MM]  11.14,6.38 90 top
U6  NRF52832  [QFN48-6X6MM]  38.14,102.38 90 top
U7  NRF52832  [QFN48-6X6MM]  38.14,78.38 90 top
U8  NRF52832  [QFN48-6X6MM]  38.14,54.38 90 top
U9  NRF52832  [QFN48-6X6MM]  38.14,30.38 90 top
U10  NRF52832  [QFN48-6X6MM]  38.14,6.38 90 top
U11  NRF52832  [QFN48-6X6MM]  65.14,102.38 90 top
U12  NRF52832  [QFN48-6X6MM]  65.14,78.38 90 top
U13  NRF52832  [QFN48-6X6MM]  65.14,54.38 90 top
U14  NRF52832  [QFN48-6X6MM]  65.14,30.38 90 top
U15  NRF52832  [QFN48-6X6MM]  65.14,6.38 90 top
U16  NRF52832  [QFN48-6X6MM]  92.14,102.38 90 top
U17  NRF52832  [QFN48-6X6MM]  92.14,78.38 90 top
U18  NRF52832  [QFN48-6X6MM]  92.14,54.38 90 top
U19  NRF52832  [QFN48-6X6MM]  92.14,30.38 90 top
U20  NRF52832  [QFN48-6X6MM]  92.14,6.38 90 top
U21  NRF52832  [QFN48-6X6MM]  119.14,102.38 90 top
U22  NRF52832  [QFN48-6X6MM]  119.14,78.38 90 top
U23  NRF52832  [QFN48-6X6MM]  119.14,54.38 90 top
U24  NRF52832  [QFN48-6X6MM]  119.14,30.38 90 top
U25  NRF52832  [QFN48-6X6MM]  119.14,6.38 90 top
U$1  ADXL362  [TFLGA-16/3.3MMX3.1MM]  13.01,102.24 270 bottom
U$2  TUNINGINDUCTOR  [0402']  13.7,114.57 90 top
U$3  2450AT14A0100  [2450AT14A0100]  23.65,117.15 0 top
U$4  ADXL362  [TFLGA-16/3.3MMX3.1MM]  13.01,78.24 270 bottom
U$5  0402-1005  [0402-1005]  16.21,112.86 180 top
U$6  32MHZCRYSTAL  [32MHZCRYSTAL]  7.44,101.81 90 bottom
U$7  32MHZCRYSTAL  [32MHZCRYSTAL]  7.44,77.81 90 bottom
U$8  ADXL362  [TFLGA-16/3.3MMX3.1MM]  13.01,54.24 270 bottom
U$9  TUNINGINDUCTOR  [0402']  13.7,66.57 90 top
U$10  2450AT14A0100  [2450AT14A0100]  23.65,69.15 0 top
U$11  0402-1005  [0402-1005]  16.21,64.86 180 top
U$12  32MHZCRYSTAL  [32MHZCRYSTAL]  7.44,53.81 90 bottom
U$13  INDUCTOR  [0402'']  7.3,52.5 0 top
U$14  INDUCTOR  [0402'']  6.5,52.5 0 top
U$15  ADXL362  [TFLGA-16/3.3MMX3.1MM]  13.01,30.24 270 bottom
U$16  32MHZCRYSTAL  [32MHZCRYSTAL]  7.44,29.81 90 bottom
U$17  INDUCTOR  [0402'']  7.45,28.55 0 top
U$18  INDUCTOR  [0402'']  6.7,28.5 0 top
U$19  ADXL362  [TFLGA-16/3.3MMX3.1MM]  13.01,6.24 270 bottom
U$20  TUNINGINDUCTOR  [0402']  13.7,18.57 90 top
U$21  2450AT14A0100  [2450AT14A0100]  23.65,21.15 0 top
U$22  0402-1005  [0402-1005]  16.21,16.86 180 top
U$23  32MHZCRYSTAL  [32MHZCRYSTAL]  7.44,5.81 90 bottom
U$24  ADXL362  [TFLGA-16/3.3MMX3.1MM]  40.01,102.24 270 bottom
U$25  TUNINGINDUCTOR  [0402']  40.7,114.57 90 top
U$26  2450AT14A0100  [2450AT14A0100]  50.65,117.15 0 top
U$27  0402-1005  [0402-1005]  43.21,112.86 180 top
U$28  32MHZCRYSTAL  [32MHZCRYSTAL]  34.44,101.81 90 bottom
U$29  ADXL362  [TFLGA-16/3.3MMX3.1MM]  40.01,78.24 270 bottom
U$30  32MHZCRYSTAL  [32MHZCRYSTAL]  34.44,77.81 90 bottom
U$31  ADXL362  [TFLGA-16/3.3MMX3.1MM]  40.01,54.24 270 bottom
U$32  TUNINGINDUCTOR  [0402']  40.7,66.57 90 top
U$33  2450AT14A0100  [2450AT14A0100]  50.65,69.15 0 top
U$34  0402-1005  [0402-1005]  43.21,64.86 180 top
U$35  32MHZCRYSTAL  [32MHZCRYSTAL]  34.44,53.81 90 bottom
U$36  INDUCTOR  [0402'']  34.3,52.5 0 top
U$37  INDUCTOR  [0402'']  33.5,52.5 0 top
U$38  ADXL362  [TFLGA-16/3.3MMX3.1MM]  40.01,30.24 270 bottom
U$39  32MHZCRYSTAL  [32MHZCRYSTAL]  34.44,29.81 90 bottom
U$40  INDUCTOR  [0402'']  34.45,28.55 0 top
U$41  INDUCTOR  [0402'']  33.7,28.5 0 top
U$42  ADXL362  [TFLGA-16/3.3MMX3.1MM]  40.01,6.24 270 bottom
U$43  TUNINGINDUCTOR  [0402']  40.7,18.57 90 top
U$44  2450AT14A0100  [2450AT14A0100]  50.65,21.15 0 top
U$45  0402-1005  [0402-1005]  43.21,16.86 180 top
U$46  32MHZCRYSTAL  [32MHZCRYSTAL]  34.44,5.81 90 bottom
U$47  ADXL362  [TFLGA-16/3.3MMX3.1MM]  67.01,102.24 270 bottom
U$48  TUNINGINDUCTOR  [0402']  67.7,114.57 90 top
U$49  2450AT14A0100  [2450AT14A0100]  77.65,117.15 0 top
U$50  0402-1005  [0402-1005]  70.21,112.86 180 top
U$51  32MHZCRYSTAL  [32MHZCRYSTAL]  61.44,101.81 90 bottom
U$52  ADXL362  [TFLGA-16/3.3MMX3.1MM]  67.01,78.24 270 bottom
U$53  32MHZCRYSTAL  [32MHZCRYSTAL]  61.44,77.81 90 bottom
U$54  ADXL362  [TFLGA-16/3.3MMX3.1MM]  67.01,54.24 270 bottom
U$55  TUNINGINDUCTOR  [0402']  67.7,66.57 90 top
U$56  2450AT14A0100  [2450AT14A0100]  77.65,69.15 0 top
U$57  0402-1005  [0402-1005]  70.21,64.86 180 top
U$58  32MHZCRYSTAL  [32MHZCRYSTAL]  61.44,53.81 90 bottom
U$59  INDUCTOR  [0402'']  61.3,52.5 0 top
U$60  INDUCTOR  [0402'']  60.5,52.5 0 top
U$61  ADXL362  [TFLGA-16/3.3MMX3.1MM]  67.01,30.24 270 bottom
U$62  32MHZCRYSTAL  [32MHZCRYSTAL]  61.44,29.81 90 bottom
U$63  INDUCTOR  [0402'']  61.45,28.55 0 top
U$64  INDUCTOR  [0402'']  60.7,28.5 0 top
U$65  ADXL362  [TFLGA-16/3.3MMX3.1MM]  67.01,6.24 270 bottom
U$66  TUNINGINDUCTOR  [0402']  67.7,18.57 90 top
U$67  2450AT14A0100  [2450AT14A0100]  77.65,21.15 0 top
U$68  0402-1005  [0402-1005]  70.21,16.86 180 top
U$69  32MHZCRYSTAL  [32MHZCRYSTAL]  61.44,5.81 90 bottom
U$70  ADXL362  [TFLGA-16/3.3MMX3.1MM]  94.01,102.24 270 bottom
U$71  TUNINGINDUCTOR  [0402']  94.7,114.57 90 top
U$72  2450AT14A0100  [2450AT14A0100]  104.65,117.15 0 top
U$73  0402-1005  [0402-1005]  97.21,112.86 180 top
U$74  32MHZCRYSTAL  [32MHZCRYSTAL]  88.44,101.81 90 bottom
U$75  ADXL362  [TFLGA-16/3.3MMX3.1MM]  94.01,78.24 270 bottom
U$76  32MHZCRYSTAL  [32MHZCRYSTAL]  88.44,77.81 90 bottom
U$77  ADXL362  [TFLGA-16/3.3MMX3.1MM]  94.01,54.24 270 bottom
U$78  TUNINGINDUCTOR  [0402']  94.7,66.57 90 top
U$79  2450AT14A0100  [2450AT14A0100]  104.65,69.15 0 top
U$80  0402-1005  [0402-1005]  97.21,64.86 180 top
U$81  32MHZCRYSTAL  [32MHZCRYSTAL]  88.44,53.81 90 bottom
U$82  INDUCTOR  [0402'']  88.3,52.5 0 top
U$83  INDUCTOR  [0402'']  87.5,52.5 0 top
U$84  ADXL362  [TFLGA-16/3.3MMX3.1MM]  94.01,30.24 270 bottom
U$85  32MHZCRYSTAL  [32MHZCRYSTAL]  88.44,29.81 90 bottom
U$86  INDUCTOR  [0402'']  88.45,28.55 0 top
U$87  INDUCTOR  [0402'']  87.7,28.5 0 top
U$88  ADXL362  [TFLGA-16/3.3MMX3.1MM]  94.01,6.24 270 bottom
U$89  TUNINGINDUCTOR  [0402']  94.7,18.57 90 top
U$90  2450AT14A0100  [2450AT14A0100]  104.65,21.15 0 top
U$91  0402-1005  [0402-1005]  97.21,16.86 180 top
U$92  32MHZCRYSTAL  [32MHZCRYSTAL]  88.44,5.81 90 bottom
U$93  ADXL362  [TFLGA-16/3.3MMX3.1MM]  121.01,102.24 270 bottom
U$94  TUNINGINDUCTOR  [0402']  121.7,114.57 90 top
U$95  2450AT14A0100  [2450AT14A0100]  131.65,117.15 0 top
U$96  0402-1005  [0402-1005]  124.21,112.86 180 top
U$97  32MHZCRYSTAL  [32MHZCRYSTAL]  115.44,101.81 90 bottom
U$98  ADXL362  [TFLGA-16/3.3MMX3.1MM]  121.01,78.24 270 bottom
U$99  32MHZCRYSTAL  [32MHZCRYSTAL]  115.44,77.81 90 bottom
U$100  ADXL362  [TFLGA-16/3.3MMX3.1MM]  121.01,54.24 270 bottom
U$101  TUNINGINDUCTOR  [0402']  121.7,66.57 90 top
U$102  2450AT14A0100  [2450AT14A0100]  131.65,69.15 0 top
U$103  0402-1005  [0402-1005]  124.21,64.86 180 top
U$104  32MHZCRYSTAL  [32MHZCRYSTAL]  115.44,53.81 90 bottom
U$105  INDUCTOR  [0402'']  115.3,52.5 0 top
U$106  INDUCTOR  [0402'']  114.5,52.5 0 top
U$107  ADXL362  [TFLGA-16/3.3MMX3.1MM]  121.01,30.24 270 bottom
U$108  32MHZCRYSTAL  [32MHZCRYSTAL]  115.44,29.81 90 bottom
U$109  INDUCTOR  [0402'']  115.45,28.55 0 top
U$110  INDUCTOR  [0402'']  114.7,28.5 0 top
U$111  ADXL362  [TFLGA-16/3.3MMX3.1MM]  121.01,6.24 270 bottom
U$112  TUNINGINDUCTOR  [0402']  121.7,18.57 90 top
U$113  2450AT14A0100  [2450AT14A0100]  131.65,21.15 0 top
U$114  0402-1005  [0402-1005]  124.21,16.86 180 top
U$115  32MHZCRYSTAL  [32MHZCRYSTAL]  115.44,5.81 90 bottom

## Library data of the parts
C1-C3 C5 C10 C12 C14 C15 C21 C22 C24 C25 C31 C32 C34 C35 C41 C42 C44 C45 C51 C52 C54 C55 C61 C62 C64 C65 C71 C72 C74 C75 C81 C82 C84 C85 C91 C92 C94 C95 C101 C102 C104 C105 C111 C112 C114 C115 C121 C122 C124 C125 C131 C132 C134 C135 C141 C142 C144 C145 C151 C152 C154 C155 C161 C162 C164 C165 C171 C172 C174 C175 C181 C182 C184 C185 C191 C192 C194 C195 C201 C202 C204 C205 C211 C212 C214 C215 C221 C222 C224 C225 C231 C232 C234 C235 C241 C242 C244 C245 = 0p1_uF_capacitor; MANUFACTURER_PART_NUMBER: C0402C0G1C101J020BC; VENDOR: TDK
C4 C16 C26 C36 C46 C56 C66 C76 C86 C96 C106 C116 C126 C136 C146 C156 C166 C176 C186 C196 C206 C216 C226 C236 C246 = 100_pF_capacitor; MANUFACTURER_PART_NUMBER: C0402C0G1C101J020BC; VENDOR: TDK
C6 C7 C17 C18 C27 C28 C37 C38 C47 C48 C57 C58 C67 C68 C77 C78 C87 C88 C97 C98 C107 C108 C117 C118 C127 C128 C137 C138 C147 C148 C157 C158 C167 C168 C177 C178 C187 C188 C197 C198 C207 C208 C217 C218 C227 C228 C237 C238 C247 C248 = 6pf_capacitor_new-bigger; DESCRIPTION: 0402 6 pF 50 V ±0.25 pF Tolerance C0G SMT Multilayer Ceramic Capacitor; DIGI-KEY_PART_NUMBER: 490-8222-1-ND; DIGI-KEY_PURCHASE_URL: https://www.digikey.com/product-detail/en/murata-electronics-north-america/GRM1555C1H6R0CA01D/490-8222-1-ND/4380516?WT.z_cid=ref_snapeda&utm_source=snapeda&utm_medium=aggregator&utm_campaign=buynow; MF: Murata; MP: GRM1555C1H6R0CA01D; PACKAGE: 0402 Murata
C8 C19 C29 C39 C49 C59 C69 C79 C89 C99 C109 C119 C129 C139 C149 C159 C169 C179 C189 C199 C209 C219 C229 C239 C249 = 1UFCAPACITOR; DESCRIPTION: Cap, Mlcc, X5r, 1uf, 6.3v, 015008; DIGI-KEY_PART_NUMBER: 490-13424-1-ND; DIGI-KEY_PURCHASE_URL: https://www.digikey.com/product-detail/en/murata-electronics-north-america/GRMMDXR60J105ME05D/490-13424-1-ND/6023636?WT.z_cid=ref_snapeda&utm_source=snapeda&utm_medium=aggregator&utm_campaign=buynow; MF: Murata; MP: GRMMDXR60J105ME05D; PACKAGE: 015008 Murata
C9 C20 C30 C40 C50 C60 C70 C80 C90 C100 C110 C120 C130 C140 C150 C160 C170 C180 C190 C200 C210 C220 C230 C240 C250 = 4p7_uF_capacitor; MANUFACTURER_PART_NUMBER: C0816X5R0J475M050AC; VENDOR: TDK
C11 C13 C23 C33 C43 C53 C63 C73 C83 C93 C103 C113 C123 C133 C143 C153 C163 C173 C183 C193 C203 C213 C223 C233 C243 = nrf52832-breakout-temp; PROD_ID: CAP-13456
E1-E10 = SparkFun-RF
J1-J25 = SparkFun-Connectors
L1-L25 = nrf52832-breakout-temp; PROD_ID: NDUC-13457
U1-U25 = nrf52832-breakout-temp; PROD_ID: IC-13460
U$1 U$4 U$8 U$15 U$19 U$24 U$29 U$31 U$38 U$42 U$47 U$52 U$54 U$61 U$65 U$70 U$75 U$77 U$84 U$88 U$93 U$98 U$100 U$107 U$111 = ADXL362
U$2 U$9 U$20 U$25 U$32 U$43 U$48 U$55 U$66 U$71 U$78 U$89 U$94 U$101 U$112 = tuninginductor
U$3 U$10 U$21 U$26 U$33 U$44 U$49 U$56 U$67 U$72 U$79 U$90 U$95 U$102 U$113 = antennanew
U$5 U$11 U$22 U$27 U$34 U$45 U$50 U$57 U$68 U$73 U$80 U$91 U$96 U$103 U$114 = 0402-1005
U$6 U$7 U$12 U$16 U$23 U$28 U$30 U$35 U$39 U$46 U$51 U$53 U$58 U$62 U$69 U$74 U$76 U$81 U$85 U$92 U$97 U$99 U$104 U$108 U$115 = 32_mhz_crystal
U$13 U$14 U$17 U$18 U$36 U$37 U$40 U$41 U$59 U$60 U$63 U$64 U$82 U$83 U$86 U$87 U$105 U$106 U$109 U$110 = inductor